# Altium PCB Main.PcbDoc
Units mil, origin at the board's own origin, x right, y up, seen from the top; angles counter-clockwise.
Board outline 1000 x 1500 mil, 4 copper layers (Top Layer, VCC, GND, Bottom Layer), stack 30.634 mil thick; 33 components, 25 nets, 103 pads, 5 vias.
Unrouted connection lines stored in the file: 59.
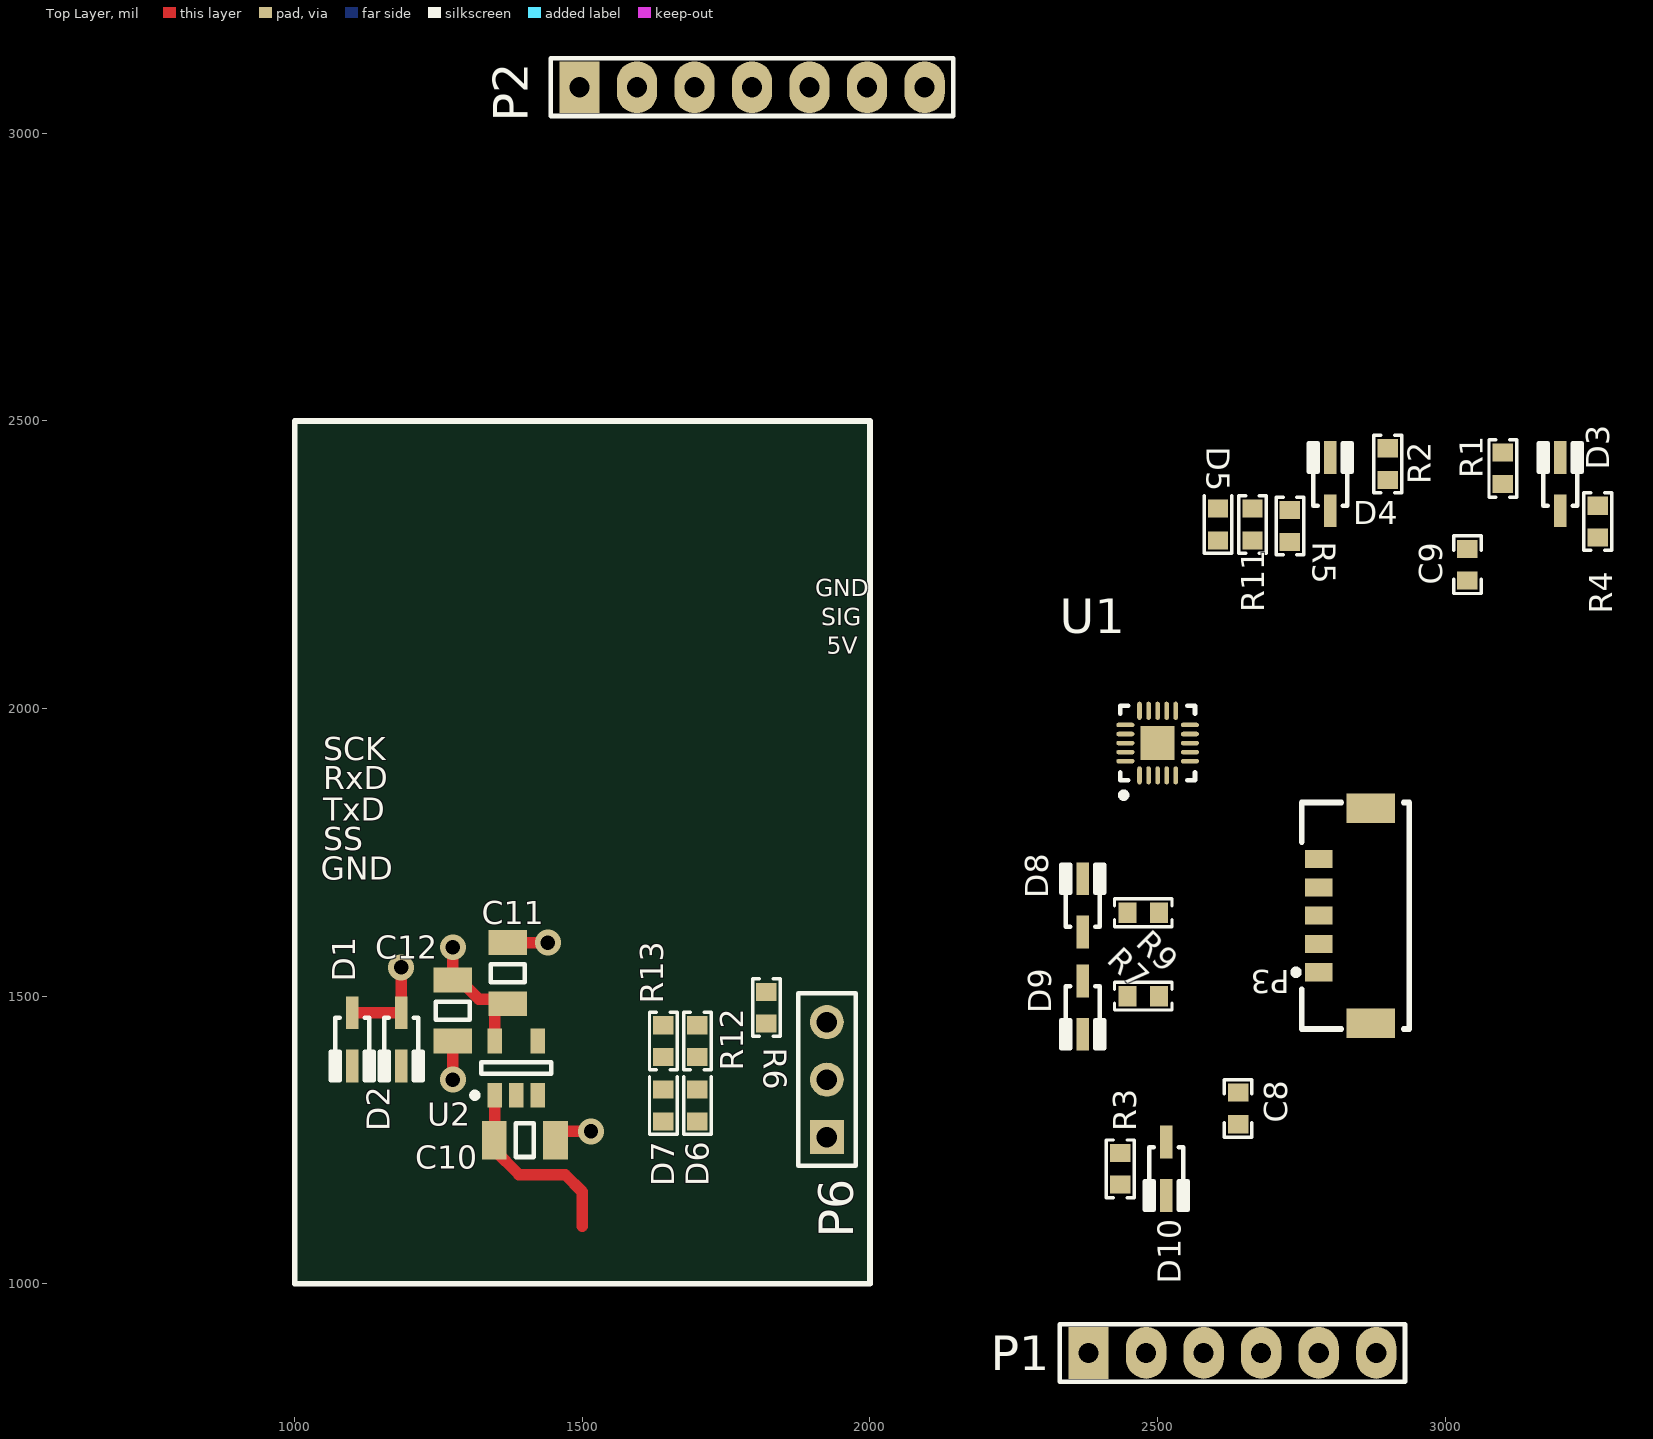
[diagram p0: Top Layer view]
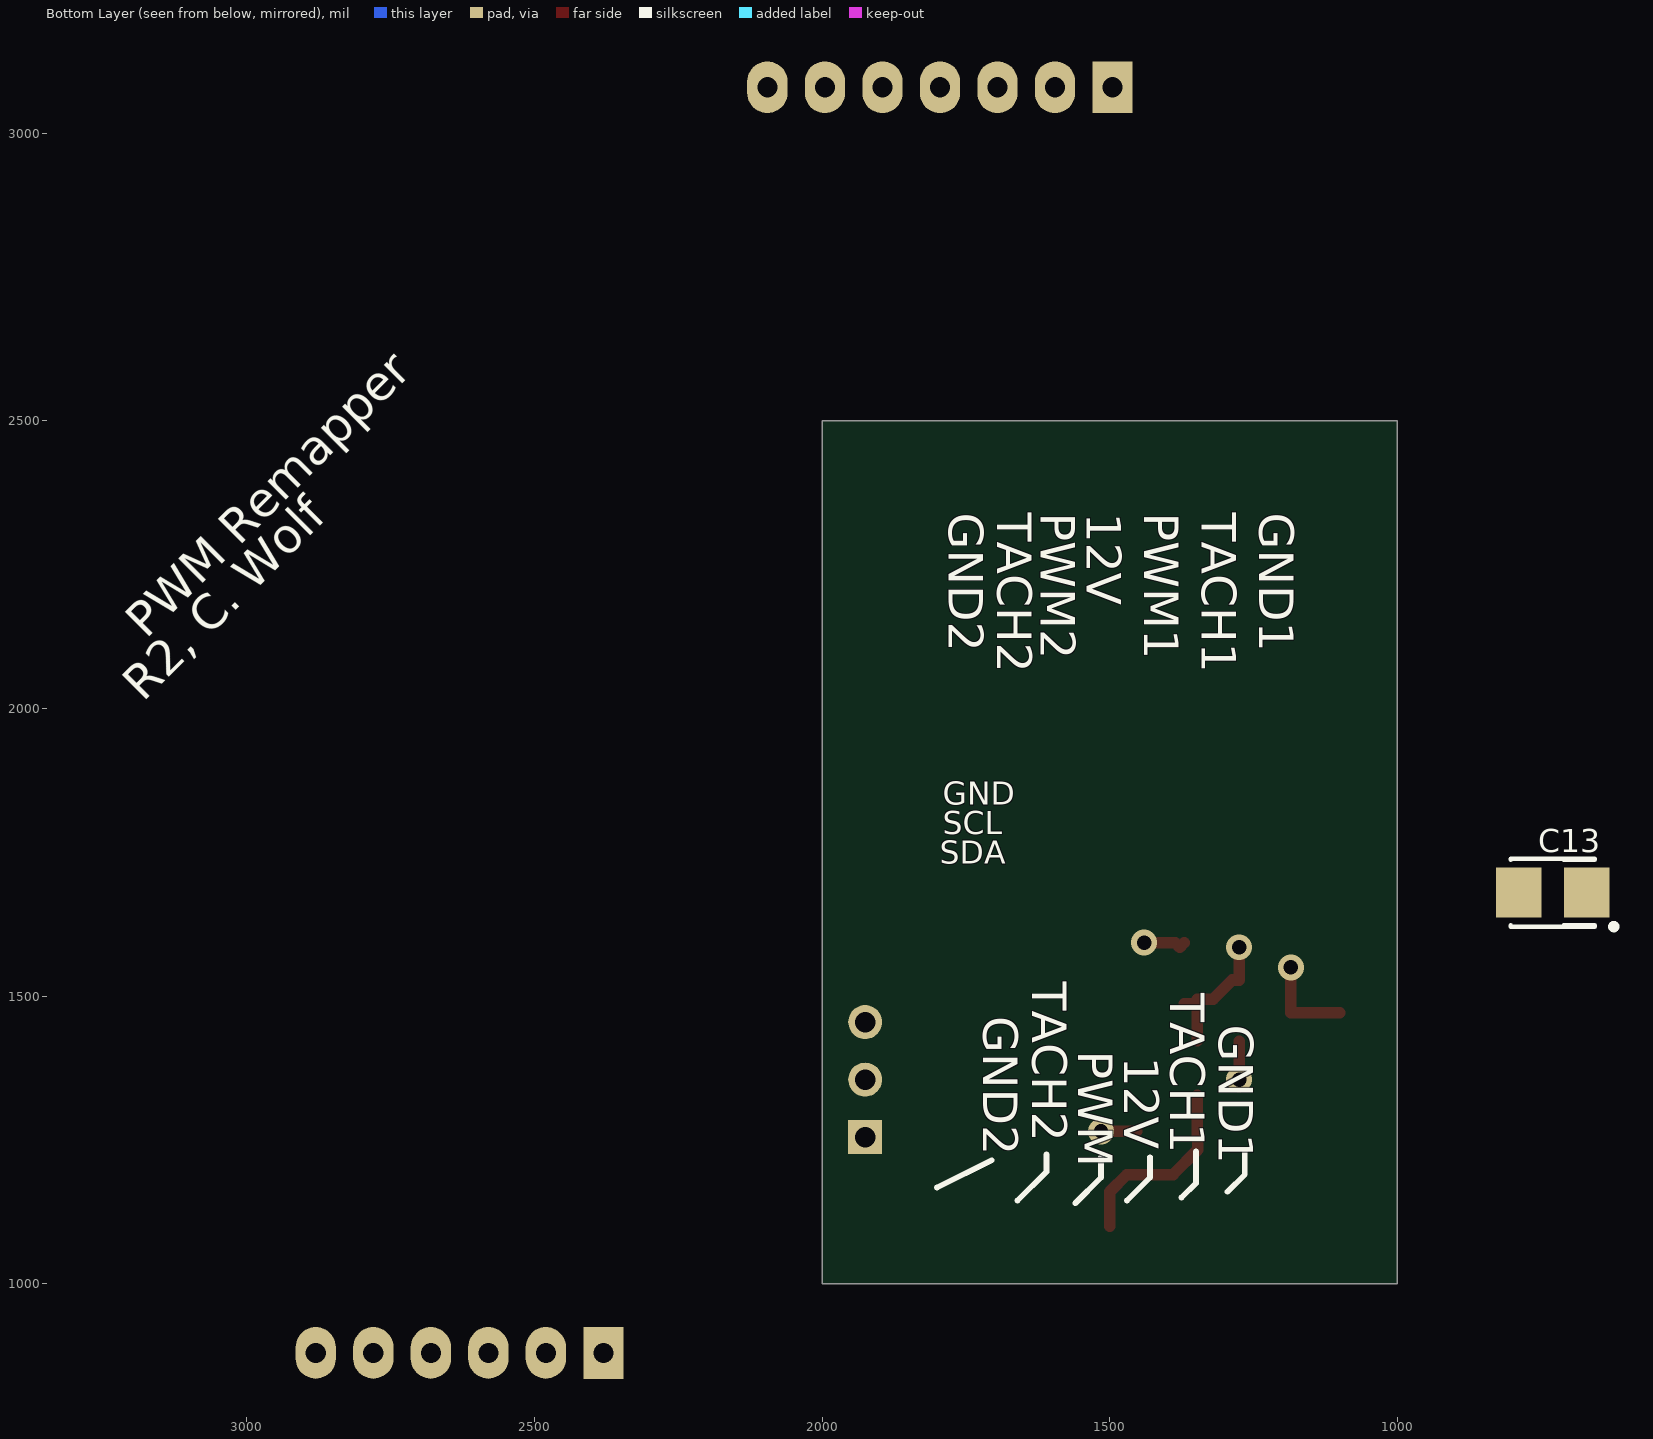
[diagram p1: Bottom Layer view, seen from below]
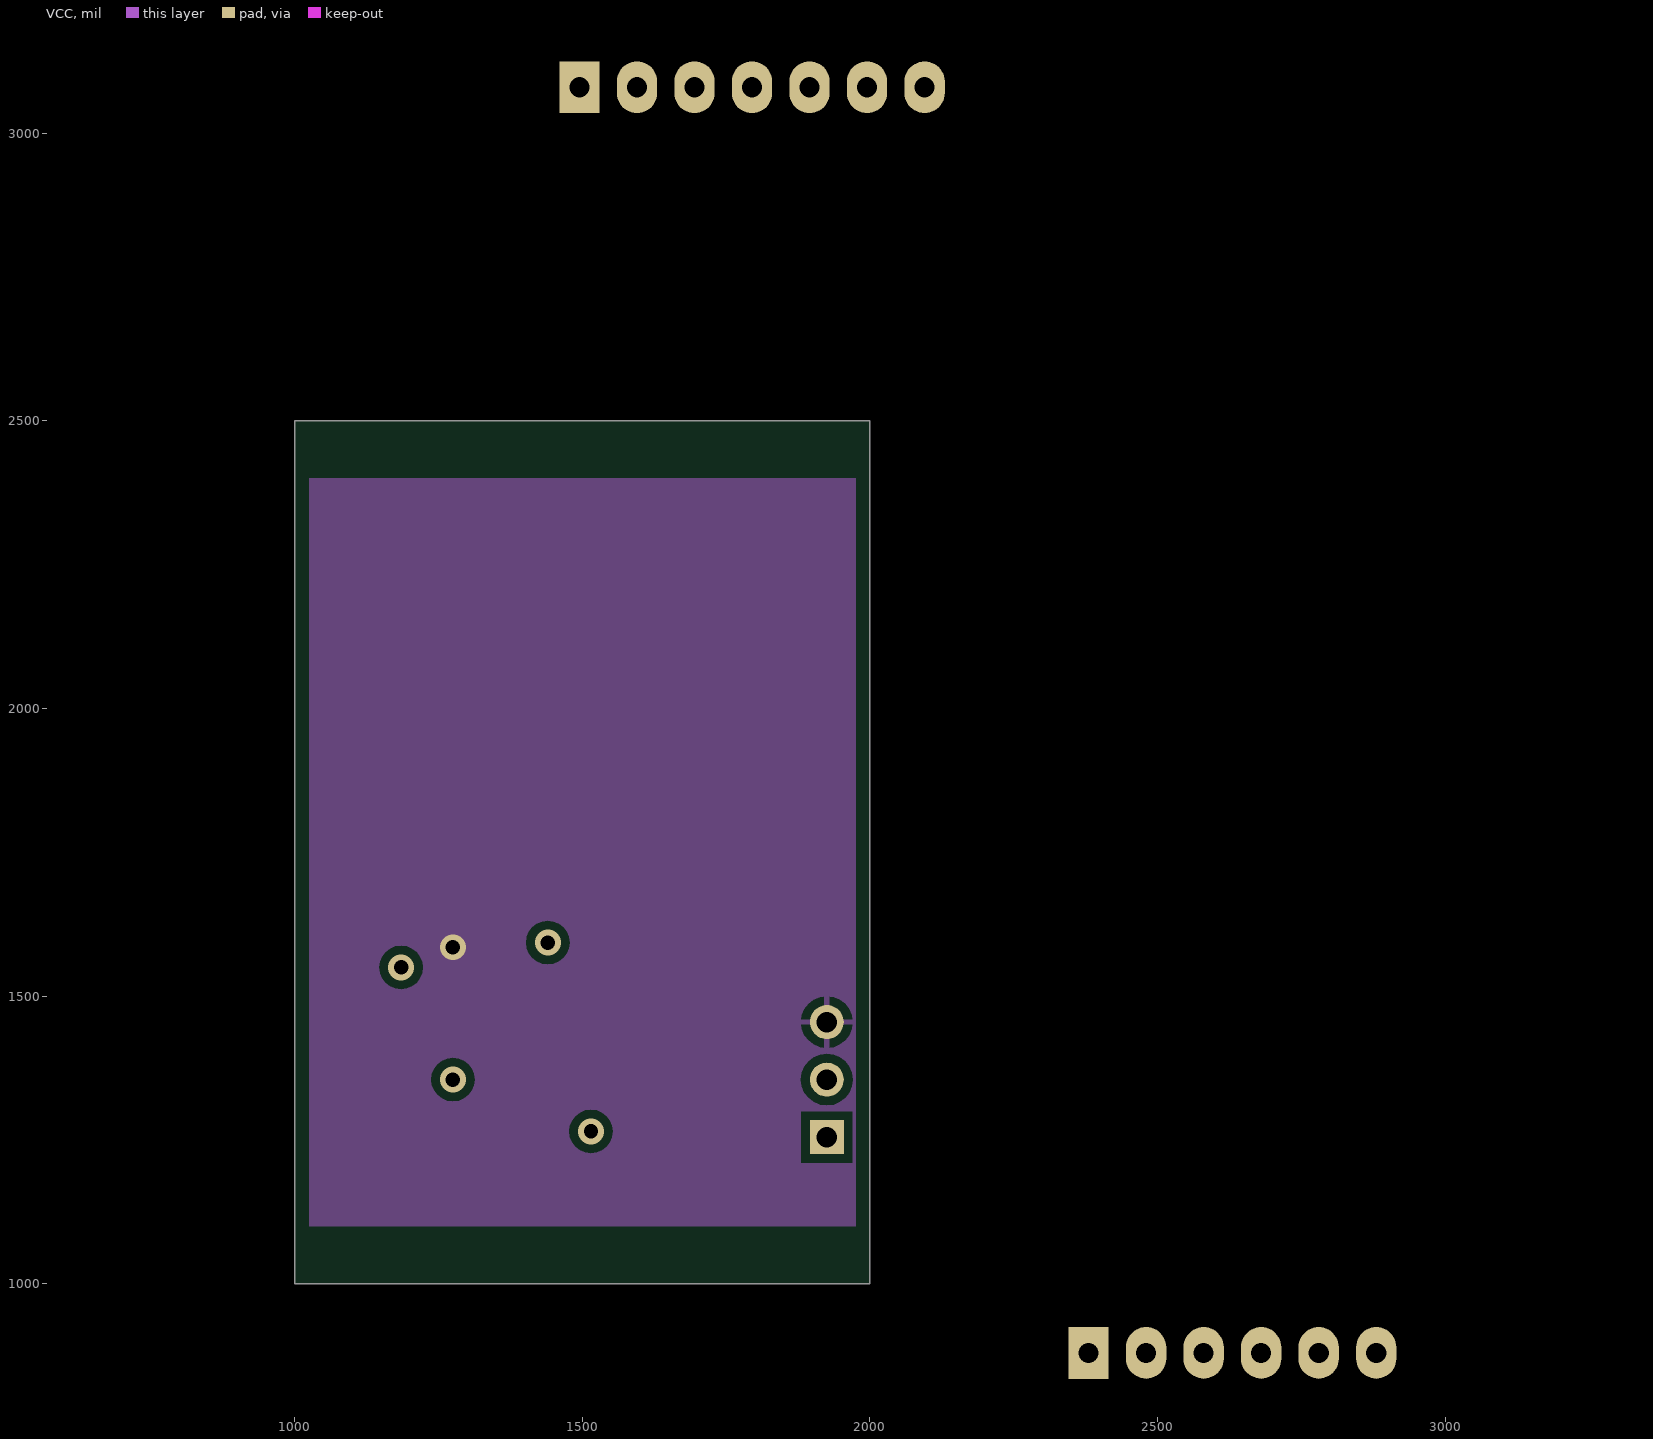
[diagram p2: VCC]
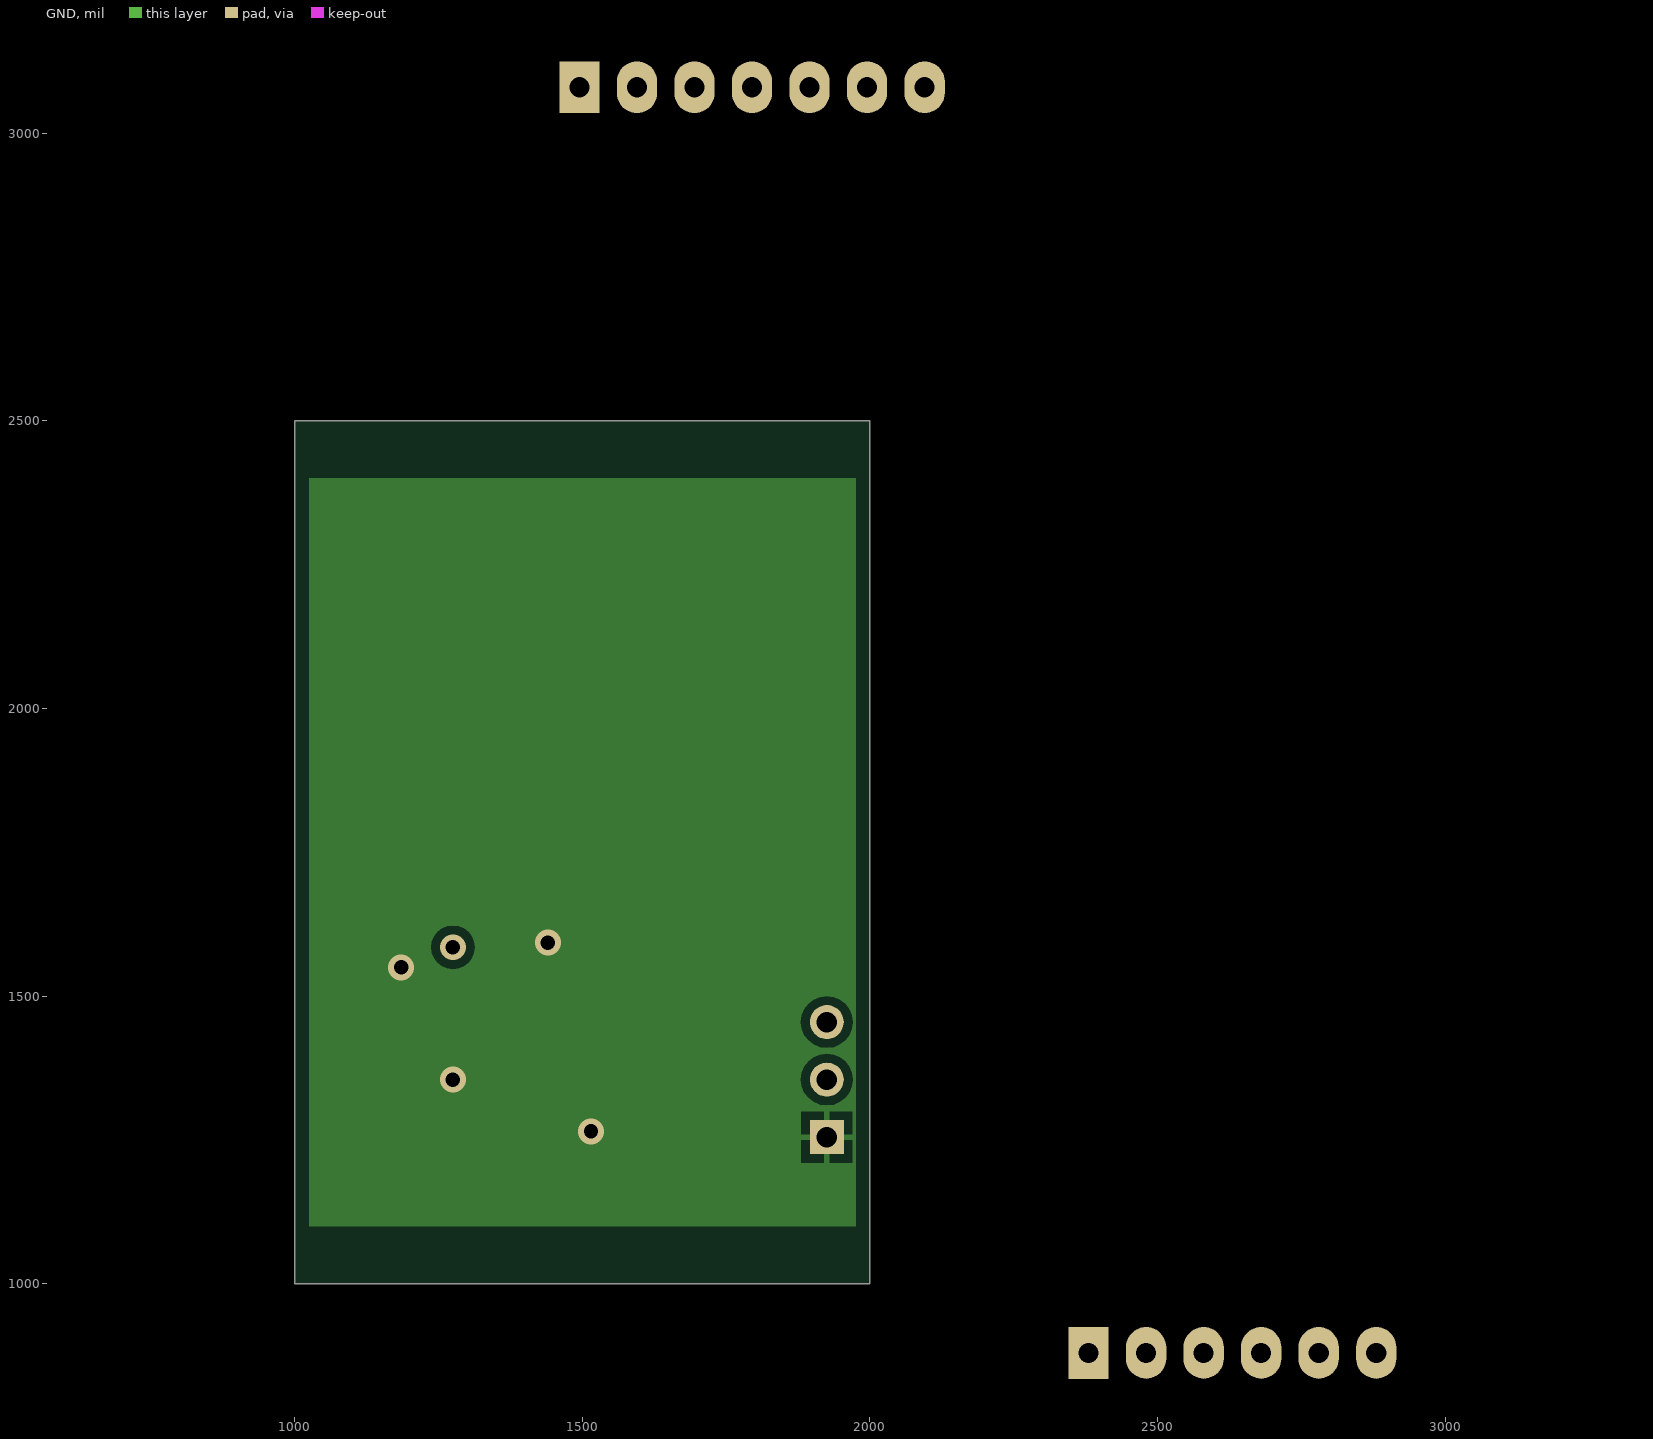
[diagram p3: GND]

## Layer stack, top to bottom
Top Solder: solder mask 0.4, Solder Resist, Dk 3.5
Top Layer: signal copper 1.4
Dielectric 1: core 10, FR-4, Dk 4.2
VCC: signal copper 1.417
Dielectric 3: prepreg 5, Dk 4.2
GND: signal copper 1.417
Dielectric 2: core 10, Dk 4.2
Bottom Layer: signal copper 1.4
Bottom Solder: solder mask 0.4, Solder Resist, Dk 3.5

## Board outline
1000,1000 1000,2500 2000,2500 2000,1000

## Design rules (kind name [scope] priority, off if disabled: settings)
Clearance Clearance_2 [InPolyGon] p1: gap=15 ignorepadtopadclearanceinfootprint=FALSE
Clearance Clearance_1 [All] p2: gap=6 ignorepadtopadclearanceinfootprint=FALSE
Clearance [not InAnyComponent vs not InAnyComponent] p3: gap=12 ignorepadtopadclearanceinfootprint=FALSE
FlightTimeFalling [All] p1: maximum=1.000n
FlightTimeRising [All] p1: maximum=1.000n
Height [All] p1: minheight=0 maxheight=10000 prefheight=500
HoleSize [All] p1: absolutevalues=TRUE maxlimit=500 minlimit=1 maxpercent=80.000 minpercent=20.000
HoleSize Testpoint [All] p2: absolutevalues=TRUE maxlimit=100 minlimit=1 maxpercent=80.000 minpercent=20.000
HoleSize TestPointUsage [All] p3: absolutevalues=TRUE maxlimit=100 minlimit=1 maxpercent=80.000 minpercent=20.000
MinimumAnnularRing [All] p1: minimumring=5
MinimumSolderMaskSliver SilkscreenOverComponentPads [All] p1: minsoldermaskwidth=10
OvershootFalling [All] p1: maximum=330.0m
OvershootRising [All] p1: maximum=330.0m
ParallelSegment [All] p1 off: limit=10000 gap=10
PolygonConnect Heatsink [IsVia] p1: connectstyle=Direct reliefconductorwidth=10 reliefentries=4 polygonreliefangle="90 Angle" airgapwidth=10
PolygonConnect [not IsVia] p2: connectstyle=Relief reliefconductorwidth=10 reliefentries=4 polygonreliefangle="90 Angle" airgapwidth=15
RoomDefinition Main [InComponentClass('Main')] p1 off: confinementstyle=ConfineIn formatcopy=TRUE lockcomponents=FALSE outline 2045,1060 8480,1060 8480,1880 2045,1880
RoutingVias [All] p1: holewidth=15 width=30 viastyle="Through Hole" minholewidth=15 minwidth=30 maxholewidth=250 maxwidth=500
SignalStimulus [All] p1: kind=2 level=0 starttime=10.00n stoptime=60.00n periodtime=100.0n
SolderMaskExpansion [All] p1: expansion=4
SupplyNets [All] p1: voltage=3.300
UndershootFalling [All] p1: maximum=330.0m
UndershootRising [All] p1: maximum=330.0m
Width Width_General [All] p1: maxlimit=250 minlimit=6 preferedwidth=10
Width "Width Differential Pair" [(InDifferentialPairClass('All Differential Pairs'))] p2: maxlimit=18.36 minlimit=3.62 preferedwidth=13.35 toplayer_maxwidth=7.77 toplayer_prefwidth=5.4 midlayer1_maxwidth=7.77 midlayer1_prefwidth=5.4 midlayer2_minwidth=0 midlayer2_maxwidth=0 midlayer2_prefwidth=0 bottomlayer_minwidth=9.59 impedancedriven=TRUE minimp=80.000000 maximp=100.000000 favimp=90.000000
27 further rules are at their usual default settings.

## Components (designator, comment, footprint, x,y, rotation, side; value= is the part's Value field where it differs from the comment)
C8 "Cap" 0603C 2640,1305 r90 top value=0.1uF
C9 "Cap" 0603C 3038.39,2250 r270 top value=0.1uF
C10 "Cap" 1206C 1400,1250 r180 top value="1.0 uF"
C11 "Cap" 1206C 1370,1540 r270 top value=">= 2.2 uF"
C12 "Cap Semi" 1206C 1275,1475 r90 top value=1.0uF
C13 "100 uF" B 730,1680 r0 bottom
D1 "Schottky Diode" SOD-323 1100,1425 r270 top
D2 "Schottky Diode" SOD-323 1185,1425 r270 top
D3 "Schottky Diode" SOD-323 3200,2390 r90 top
D4 "Schottky Diode" SOD-323 2800,2390 r90 top
D5 "LED0" "0603 SMT LED" 2605,2320 r90 top
D6 "LED0" "0603 SMT LED" 1700,1310 r90 top
D7 "LED0" "0603 SMT LED" 1640.75,1310 r90 top
D8 "Schottky Diode" SOD-323 2370,1657.99 r90 top
D9 "Schottky Diode" SOD-323 2370,1480.24 r270 top
D10 "Schottky Diode" SOD-323 2515,1200 r270 top
P1 "Header 6" HDR1X6 2380,880 r0 top
P2 "Header 7" HDR1X7 1495,3080 r0 top
P3 "Header 5" "Molex 5055670571" 2780,1640 r270 top
P6 "Header 3" HDR1X3 1925,1255 r90 top
R1 "Res Semi Small" 0603R 3100,2417.56 r270 top value=100R
R2 "Res Semi Small" 0603R 2900,2425 r270 top value=100R
R3 "Res Semi Small" 0603R 2435,1200 r90 top value=100R
R4 "Res Semi Small" 0603R 3265,2325 r270 top value=10K
R5 "Res Semi Small" 0603R 2730,2317.32 r90 top value=10K
R6 "Res Semi Small" 0603R 1820,1480 r90 top value=10K
R7 "Res Semi Small" 0603R 2475,1500 r0 top value=10K
R9 "Res Semi Small" 0603R 2475,1645 r0 top value=10K
R11 "Res Semi" 0603R 2665,2320 r90 top value=330R
R12 "Res Semi" 0603R 1700,1421.85 r90 top value=330R
R13 "Res Semi" 0603R 1640.75,1421.85 r90 top value=330R
U1 "ATTiny1616-MFR" QFN40P300X300X90_HS-21N 2500,1940 r90 top
U2 "TPS70950" SOT23-5AN 1385,1375 r90 top

## Footprints (in the part's own frame and the unit in brackets; to place one, negate y for a bottom-side part, rotate by r counter-clockwise, add the part's x,y. Pads: shape width x height; smd on the part's side, far side on the other; paste and mask are expansions set on the pad)
"0603 SMT LED" [mm]
  rect 0.8x0.9 smd: 1(0.7,0) 2(-0.7,0)
  silkscreen extent -1.27,-0.61 1.27,0.61, body extent -0.87,-0.48 0.88,0.48, height 1.3
0603C [mm] "0603 Size Capacitor"
  rect 0.8x0.9 smd: 1(-0.7,0) 2(0.7,0)
  silkscreen extent -1.27,-0.61 1.27,0.61, body extent -0.87,-0.48 0.87,0.48, height 1.3
0603R [mm]
  rect 0.8x0.9 smd: 1(-0.7,0) 2(0.7,0)
  silkscreen extent -1.27,-0.61 1.27,0.61, body extent -0.87,-0.48 0.87,0.48, height 1.3
1206C [mm] "1206 Chip Capacitor"
  rect 1.1x1.7 smd: 1(-1.35,0) 2(1.35,0)
  silkscreen extent -0.4,-0.75 0.4,0.75, body extent -1.7,-0.9 1.7,0.9, height 1.3
B [mm] "Capacitor, SM Tantalum; Body 3.5 x 2.8 mm (LxW typ)"
  rect 2x2.2 smd: 1(-1.5,0) 2(1.5,0)
  silkscreen extent -2.82,-1.5 1.85,1.62, body extent -2.6,-1.4 2.6,1.4, height 2.1
HDR1X3 [mm] "Connector; Header; 3 Position"
  rect 1.5x1.5 hole 0.9: 1(0,0)
  round 1.5 hole 0.9: 2(2.54,0) 3(5.08,0)
  silkscreen extent -1.27,-1.27 6.35,1.27
HDR1X6 [mil] "Connector; Header; 6 Position"
  rect 70x90 hole 35: 1(0,0)
  oval 70x90 hole 35: 2(100,0) 3(200,0) 4(300,0) 5(400,0) 6(500,0)
  silkscreen extent -50,-50 550,50
HDR1X7 [mil] "Connector; Header; 7 Position"
  rect 70x90 hole 35: 1(0,0)
  oval 70x90 hole 35: 2(100,0) 3(200,0) 4(300,0) 5(400,0) 6(500,0) 7(600,0)
  silkscreen extent -50,-50 650,50
"Molex 5055670571" [mm] "Molex Micro-Lock Plus 5 pin"
  rect 1.3x2.15 smd: 0(-4.75,2.295) 0(4.75,2.295)
  rect 0.8x1.2 smd: 1(2.5,0) 2(1.25,0) 3(0,0) 4(-1.25,0) 5(-2.5,0)
  silkscreen extent -5,-1.12 5,4, body extent -4.75,-0.45 4.75,3.75, height 3.91
QFN40P300X300X90_HS-21N [mm] "QFN, 20-Leads, Body 3.00x3.00mm, Pitch 0.40mm, Thermal Pad 1.70x1.70mm, IPC Medium Density"
  oval 0.8x0.2 smd paste+0: 1(-1.425,0.8) 2(-1.425,0.4) 3(-1.425,0) 4(-1.425,-0.4) 5(-1.425,-0.8) 11(1.425,-0.8) 12(1.425,-0.4) 13(1.425,0) 14(1.425,0.4) 15(1.425,0.8)
  oval 0.2x0.8 smd paste+0: 6(-0.8,-1.425) 7(-0.4,-1.425) 8(0,-1.425) 9(0.4,-1.425) 10(0.8,-1.425) 16(0.8,1.425) 17(0.4,1.425) 18(0,1.425) 19(-0.4,1.425) 20(-0.8,1.425)
  rect 1.5x1.5 smd paste-0.2: 21(0,0)
  silkscreen extent -2.42,-1.65 1.65,1.65, body extent -1.54,-1.54 1.54,1.54, height 0.9
SOD-323 [mm] "SOD-323/SC-76; 2 Leads; Body 1.7 x 1.3 mm, (LxW)"
  rect 1.45x0.55 smd: 1(1.175,0) 2(-1.175,0)
  silkscreen extent -0.95,-0.95 1.8,0.95, body extent -2,-0.85 2,0.85, height 1.1
SOT23-5AN [mm] "SOT23, 5-Leads, Body 2.9x1.6mm, Pitch 0.95mm, Lead Span 2.8mm, IPC Medium Density"
  rect 1.1x0.65 smd: 1(-1.2,0.95) 2(-1.2,0) 3(-1.2,-0.95) 4(1.2,-0.95) 5(1.2,0.95)
  silkscreen extent -1.32,-1.55 0.25,1.95, body extent -1.48,-1.55 1.52,1.55, height 1.45

## Part data
C8 C9: "Capacitor", Supplier Part Number 1=445-1316-1-ND, Cost=derp, Supplier 1=Digi-Key
C10 C11: "Capacitor", LatestRevisionDate=17-Jul-2002, LatestRevisionNote="Re-released for DXP Platform.", PackageReference=RAD-0.3, Published=8-Jun-2000, Publisher="Altium Limited"
C12: "Capacitor (Semiconductor SIM Model)", LatestRevisionDate=17-Jul-2002, LatestRevisionNote="Re-released for DXP Platform.", PackageReference=C1206, Published=8-Jun-2000, Publisher="Altium Limited"
C13: library part "100 uf SMT Panasonic Cap"
D5: "T 1 3/4 LED", Supplier Part Number 1=160-1443-1-ND, LatestRevisionDate=08-Jul-2005, LatestRevisionNote="Mech Layer 1 removed.", PackageReference=LED-0, Published=8-Jun-2000, Publisher="Altium Limited", Supplier 1=Digi-Key
D6: "T 1 3/4 LED", Supplier Part Number 1=160-1447-1-ND, LatestRevisionDate=08-Jul-2005, LatestRevisionNote="Mech Layer 1 removed.", PackageReference=LED-0, Published=8-Jun-2000, Publisher="Altium Limited", Supplier 1=Digi-Key
D7: "T 1 3/4 LED", Supplier Part Number 1=160-1647-1-ND, LatestRevisionDate=08-Jul-2005, LatestRevisionNote="Mech Layer 1 removed.", PackageReference=LED-0, Published=8-Jun-2000, Publisher="Altium Limited", Supplier 1=Digi-Key
P1: "Header, 6-Pin", LatestRevisionDate=17-Jul-2002, LatestRevisionNote="Re-released for DXP Platform.", Publisher="Altium Limited"
P2: "Header, 7-Pin", LatestRevisionDate=17-Jul-2002, LatestRevisionNote="Re-released for DXP Platform.", Publisher="Altium Limited"
P3: "Header, 5-Pin", LatestRevisionDate=17-Jul-2002, LatestRevisionNote="Re-released for DXP Platform.", Publisher="Altium Limited"
P6: "Header, 3-Pin", LatestRevisionDate=17-Jul-2002, LatestRevisionNote="Re-released for DXP Platform.", Publisher="Altium Limited"
R1 R2 R3 R4 R5 R6 R7 R9: "Semiconductor Resistor", LatestRevisionDate=17-Jul-2002, LatestRevisionNote="Re-released for DXP Platform.", PackageReference=AXIAL-0.5, Published=8-Jun-2000, Publisher="Altium Limited"
R11 R12 R13: "SMT Resistor", Supplier Part Number 1=1276-5052-1-ND, LatestRevisionDate=17-Jul-2002, LatestRevisionNote="Re-released for DXP Platform.", PackageReference=AXIAL-0.5, Published=8-Jun-2000, Publisher="Altium Limited", Supplier 1=Digi-Key
U2: library part TPS709XX, "150-mA, 30-V, Ultra-Low IQ, Wide Input Low-Dropout Regulator with Reverse Current Protection", Supplier Part Number 1=296-35484-1-ND, DKPN="296-35483-1-ND (3.3V Version)", Supplier 1=Digi-Key

## Via types
v1: diameter 45, hole 25, Top Layer to Bottom Layer, tented both sides, 5 vias

## Nets (pads, with @x,y where several pads share a name; then routed paths per layer and width w, separated by ;. In a path a pad name is that pad's centre, name@x,y a point inside that pad or via, vN(x,y) a via of type N, cw(c..) or ccw(c..) an arc to the next point about the centre after c; other vN are vias at no path point)
5V: C8.2 C9.2 C11.2 C12.2 C13.1 D8.1 D9.1 D10.1 P6.3 R4.2 R5.2 R6.2 R7.2 R9.2 R11.2 U1.4 U2.5 | length 238.3
  Top Layer w20: v1(1275,1585) C12.2 1286.85,1528.15 1320,1495 1347.6,1495 C11.2@1347.6,1486.85 ; U2.5 C11.2@1347.6,1486.85 ; C11.2 C11.2@1347.6,1486.85
12V: C10.2 P1.3 P2.4 U2.1 | length 338.5
  Top Layer w20: U2.1 1347.6,1250.75 C10.2 1346.85,1232.99 1389.84,1190 1470,1190 1500,1160 1500,1100
GND: C8.1 C9.1 C10.1 C11.1 C12.1 C13.2 D1.2 D2.2 D5.2 D6.2 D7.2 P3.5 P6.1 U1.3 U1.21 U2.2 | length 374.9
  Top Layer w20: D1.2 D2.2 v1(1185,1550) ; v1(1275,1355) C12.1 ; C11.1 1378.15,1585 1386.3,1593.15 v1(1440,1593.15) ; C10.1@1453.15,1265 v1(1515,1265)
  Bottom Layer w20: v1(1440,1593.15) v1@1444.06,1589.09
Gnd1: D1.1 P1.1 P2.1
Gnd2: D2.1 P1.6 P2.7
NetD3_2: D3.2 R4.1 U1.6
NetD4_2: D4.2 R5.1 U1.7
NetD5_1: D5.1 R11.1
NetD6_1: D6.1 R12.1
NetD7_1: D7.1 R13.1
NetD10_2: D10.2 R3.2 U1.8
NetP3_3: P3.3 U1.2
NetP3_4: P3.4 U1.18
NetR1_2: R1.2 U1.14
NetR2_2: R2.2 U1.13
NetR12_2: R12.2 U1.17
NetR13_2: R13.2 U1.16
PWM_IN: P1.4 R3.1
PWM_OUT1: P2.3 R2.1
PWM_OUT2: P2.5 R1.1
SCL: D8.2 P3.2 R9.1 U1.1
SDA: D9.2 P3.1 R7.1 U1.20
Tach1: D4.1 P1.2 P2.2
Tach2: D3.1 P1.5 P2.6
UPDI/R\E\S\E\T\: P6.2 R6.1 U1.19
pads on no net: P3.0 U1.5 U1.9 U1.10 U1.11 U1.12 U1.15 U2.3 U2.4

## Polygon pours and split planes (outlines as drawn)
5V on VCC "VCC-5V" (solid, pour order 0): 1025,1100 1025,2400 1975,2400 1975,1100
GND on GND "GND-GND" (solid, pour order 2): 1025,1100 1025,2400 1975,2400 1975,1100

## Other copper
Top Layer:
  region: 1240,1904.25

## Silkscreen, mask and mechanical layers (free items; w line width, h text height)
Top Overlay:
  the board outline again, w10
  text "GND" at 1905,2195 h30
  text "SIG" at 1915,2145 h30
  text "5V" at 1925,2095 h30
  text "SCK" at 1050,1910 h40
  text "RxD" at 1050,1860 h40
  text "TxD" at 1050,1805 h40
  text "SS" at 1050,1754 h40
  text "GND" at 1045,1702.64 h40
Bottom Overlay:
  lines w10: 1265,1230 1265,1190 1295,1160 ; 1350,1230 1350,1175 1375,1150 ; 1430,1220 1430,1185 1470,1145 ; 1515,1220 1515,1185 1560,1140 ; 1610,1225 1610,1195 1660,1145 ; 1705,1215 1800,1167.56
  text "GND1" at 1240,2340 h60 r90
  text "TACH1" at 1340,2340 h60 r90
  text "PWM1" at 1440,2340 h60 r90
  text "12V" at 1540,2340 h60 r90
  text "PWM2" at 1620,2340 h60 r90
  text "TACH2" at 1695,2340 h60 r90
  text "GND2" at 1780,2340 h60 r90
  text "PWM Remapper" at 3175,2120 h60 r315
  text "R2, C. Wolf" at 3180,2010 h60 r315
  text "GND" at 1790,1832.56 h40
  text "SCL" at 1790,1781.61 h40
  text "SDA" at 1795,1730 h40
  text "TACH2" at 1635,1525 h60 r90
  text "TACH1" at 1395,1505 h60 r90
  text "GND2" at 1720,1465 h60 r90
  text "GND1" at 1310,1450 h60 r90
  text "PWM" at 1555,1405 h60 r90
  text "12V" at 1475,1395 h60 r90
Mechanical 2:
  the board outline again, w10